# EAGLE board tlc5947-breakout (EAGLE 5.10)
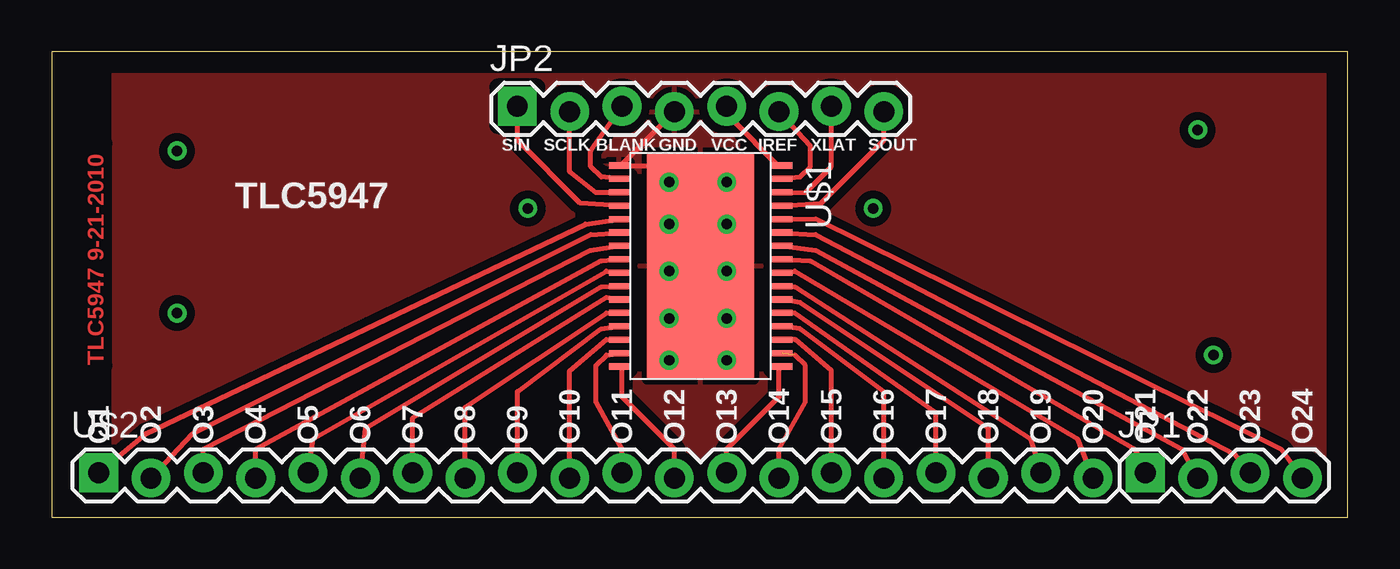
[diagram p0: board, top side]
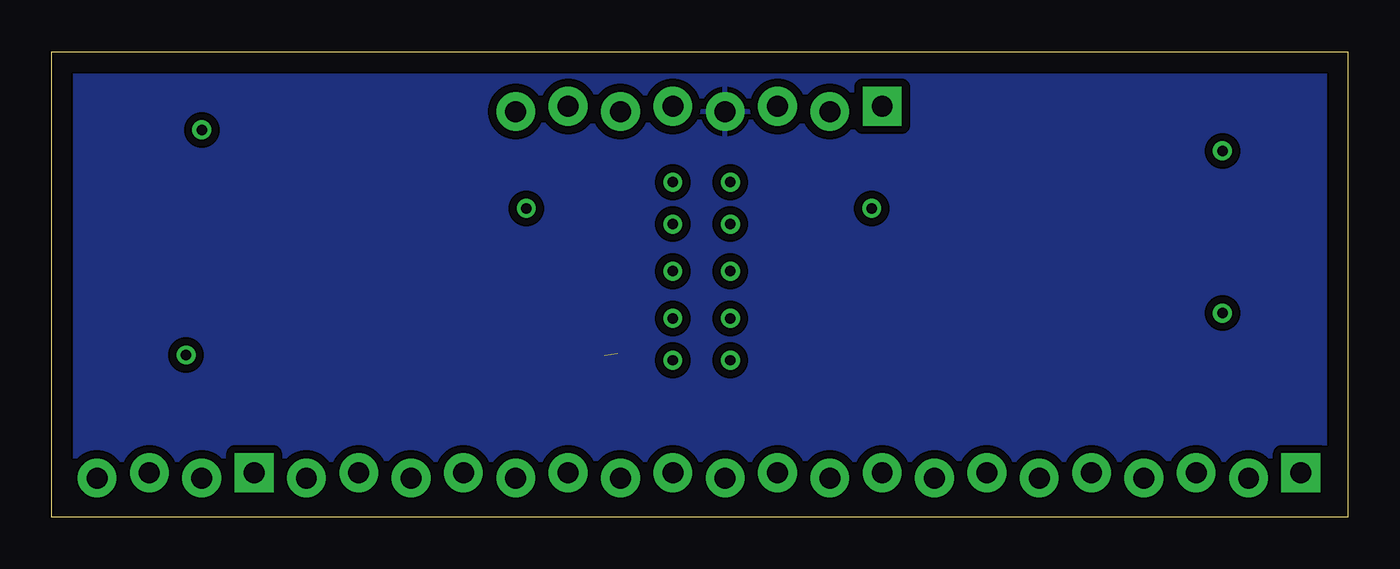
[diagram p1: board, bottom side, seen from below]

Size 62.92 x 22.6 mm. Coordinates in mm from the lower left corner, seen from the top.
Outline: 0,0 62.92,0 62.92,22.6 0,22.6 0,0
Copper layers (1*16): Top 0.035mm / dielectric 1.5mm / Bottom 0.035mm
Design rules "default": minimum track width 10mil, minimum drill 24mil, track to track 8mil, track to pad 8mil, pad to pad 8mil, via to via 8mil, smd to smd 8mil, copper to edge 40mil, drill to drill 8mil, minimum pad ring 10mil, minimum via ring 8mil, stop-mask expansion 4mil, vias tented up to drill 0mil, thermal gap 10mil

## Footprints (pad centres in the part's own frame; a part is rotated, then mirrored left to right if it is on the bottom)
1X04_LOCK = drill 1.016 pad 1.88 square: 1 0,0.127 | drill 1.016 pad 1.88 round: 2 2.54,-0.127; 3 5.08,0.127; 4 7.62,-0.127
1X08_LOCK = drill 1.016 pad 1.88 square: 1 0,0.127 | drill 1.016 pad 1.88 round: 2 2.54,-0.127; 3 5.08,0.127; 4 7.62,-0.127; 5 10.16,0.127; 6 12.7,-0.127; 7 15.24,0.127; 8 17.78,-0.127
HTSSOP32DAP = smd 0.3 x 1: 1 -4.875,-3.95; 2 -4.225,-3.95; 3 -3.575,-3.95; 4 -2.925,-3.95; 5 -2.275,-3.95; 6 -1.625,-3.95; 7 -0.975,-3.95; 8 -0.325,-3.95; 9 0.325,-3.95; 10 0.975,-3.95; 11 1.625,-3.95; 12 2.275,-3.95; 13 2.925,-3.95; 14 3.575,-3.95; 15 4.225,-3.95; 16 4.875,-3.95; 17 4.875,3.95; 18 4.225,3.95; 19 3.575,3.95; 20 2.925,3.95; 21 2.275,3.95; 22 1.625,3.95; 23 0.975,3.95; 24 0.325,3.95; 25 -0.325,3.95; 26 -0.975,3.95; 27 -1.625,3.95; 28 -2.275,3.95; 29 -2.925,3.95; 30 -3.575,3.95; 31 -4.225,3.95; 32 -4.875,3.95 | smd 11 x 5.2: EXP 0,0
1X20_LOCK = drill 1.016 pad 1.88 square: 1 0,0.127 | drill 1.016 pad 1.88 round: 2 2.54,-0.127; 3 5.08,0.127; 4 7.62,-0.127; 5 10.16,0.127; 6 12.7,-0.127; 7 15.24,0.127; 8 17.78,-0.127; 9 20.32,0.127; 10 22.86,-0.127; 11 25.4,0.127; 12 27.94,-0.127; 13 30.48,0.127; 14 33.02,-0.127; 15 35.56,0.127; 16 38.1,-0.127; 17 40.64,0.127; 18 43.18,-0.127; 19 45.72,0.127; 20 48.26,-0.127

## Placement (x,y rotation side)
JP1  [1X04_LOCK]  53.09,2.03 0 top
JP2  [1X08_LOCK]  22.61,19.81 0 top
U$1  TLC5947DAP  [HTSSOP32DAP]  31.5,12.19 270 top
U$2  M20LOCK  [1X20_LOCK]  2.29,2.03 0 top

## Library data of the parts
JP1 JP2 U$2 = SparkFun
U$1 = ideabot

## Nets
GND: JP2.4 U$1.1 U$1.EXP
N$1: U$1.16 U$2.12
N$2: U$1.15 U$2.11
N$3: U$1.14 U$2.10
N$4: U$1.13 U$2.9
N$5: U$1.12 U$2.8
N$6: U$1.11 U$2.7
N$7: U$1.10 U$2.6
N$8: U$1.9 U$2.5
N$9: U$1.8 U$2.4
N$10: U$1.7 U$2.3
N$11: U$1.6 U$2.2
N$12: U$1.5 U$2.1
N$13: U$1.17 U$2.13
N$14: U$1.18 U$2.14
N$15: U$1.19 U$2.15
N$16: U$1.20 U$2.16
N$17: U$1.21 U$2.17
N$18: U$1.22 U$2.18
N$19: U$1.23 U$2.19
N$20: U$1.24 U$2.20
N$21: JP1.1 U$1.25
N$22: JP1.2 U$1.26
N$23: JP1.3 U$1.27
N$24: JP1.4 U$1.28
N$25: JP2.8 U$1.29
N$26: JP2.7 U$1.30
N$27: JP2.6 U$1.31
N$29: JP2.1 U$1.4
N$31: JP2.3 U$1.2
N$32: JP2.2 U$1.3
S$2: JP2.5 U$1.32

## Tracks (layer width: path | path; a pad name or v marks a point on that pad's centre or on a via)
GND
  Top 0.254: JP2.4 27.61,17.07 U$1.1 29.16,17.07 29.21,17.02 29.21,14.48 U$1.EXP
  pour Top (isolate 0.406): 3.05,0.51 3.05,21.59 62.23,21.59 62.23,0.51
  pour Bottom (isolate 0.406): 62.23,0.51 0.76,0.51 0.76,21.84 62.23,21.84
N$1
  Top 0.254: U$2.12 30.23,3.3 27.69,5.84 27.69,7.18 U$1.16
N$2
  Top 0.254: U$2.11 27.69,3.3 26.42,5.59 26.42,7.37 26.92,7.87 U$1.15
N$3
  Top 0.254: U$2.10 25.15,7.11 26.92,8.64 U$1.14
N$4
  Top 0.254: U$2.9 22.61,6.1 26.67,9.14 U$1.13
N$5
  Top 0.254: U$2.8 20.07,5.33 26.92,9.91 U$1.12
N$6
  Top 0.254: U$2.7 17.53,4.83 26.92,10.67 U$1.11
N$7
  Top 0.254: U$2.6 15.24,4.32 26.67,11.18 U$1.10
N$8
  Top 0.254: U$2.5 12.7,3.81 26.92,11.94 U$1.9
N$9
  Top 0.254: U$2.4 9.91,3.3 26.67,12.45 U$1.8
N$10
  Top 0.254: U$2.3 7.37,3.3 26.16,12.95 U$1.7
N$11
  Top 0.254: U$2.2 6.86,4.06 26.16,13.72 U$1.6
N$12
  Top 0.254: U$2.1 4.57,4.06 25.91,14.22 U$1.5
N$13
  Top 0.254: U$2.13 32.77,3.3 35.31,5.84 35.31,7.18 U$1.17
N$14  (1 unrouted)
  Top 0.254: U$2.14 35.31,3.3 36.58,5.59 36.58,7.37 36.07,7.87
N$15
  Top 0.254: U$2.15 37.85,7.11 36.07,8.64 U$1.19
N$16
  Top 0.254: U$2.16 40.39,6.1 36.32,9.14 U$1.20
N$17
  Top 0.254: U$2.17 42.93,5.08 36.07,9.91 U$1.21
N$18
  Top 0.254: U$2.18 45.47,4.32 36.32,10.41 U$1.22
N$19
  Top 0.254: U$2.19 47.5,3.81 36.07,11.18 U$1.23
N$20
  Top 0.254: U$2.20 49.78,3.81 36.07,11.94 U$1.24
N$21
  Top 0.254: JP1.1 52.58,3.3 36.83,12.45 U$1.25
N$22
  Top 0.254: JP1.2 54.86,3.3 37.08,12.95 U$1.26
N$23
  Top 0.254: JP1.3 57.4,3.05 37.08,13.72 U$1.27
N$24
  Top 0.254: JP1.4 59.69,3.3 37.08,14.48 U$1.28
N$25
  Top 0.254: U$1.29 37.34,15.24 40.39,18.29 JP2.8
N$26
  Top 0.254: U$1.30 36.58,15.75 37.85,17.02 JP2.7
N$27
  Top 0.254: U$1.31 36.32,16.51 36.83,17.02 36.83,18.03 JP2.6
N$29
  Top 0.254: U$1.4 25.65,15.24 22.61,18.29 JP2.1
N$31
  Top 0.254: U$1.2 26.67,16.51 26.16,17.02 26.16,17.78 JP2.3
N$32
  Top 0.254: U$1.3 27.43,15.75 26.42,15.75 25.15,16.76 JP2.2
S$1  (via drill 0.51)
  other vias: 6.1,17.78
S$2
  Top 0.254: U$1.32 35.26,17.07 33.02,19.3 33.02,19.69 JP2.5
S$3  (via drill 0.51)
  other vias: 29.97,16.26
S$4  (via drill 0.51)
  other vias: 32.77,16.26
S$5  (via drill 0.51)
  other vias: 32.77,14.22
S$6  (via drill 0.51)
  other vias: 29.97,14.22
S$7  (via drill 0.51)
  other vias: 29.97,11.94
S$8  (via drill 0.51)
  other vias: 32.77,11.94
S$9  (via drill 0.51)
  other vias: 32.77,9.65
S$10  (via drill 0.51)
  other vias: 29.97,9.65
S$11  (via drill 0.51)
  other vias: 29.97,7.62
S$12  (via drill 0.51)
  other vias: 32.77,7.62
S$13  (via drill 0.51)
  other vias: 6.1,9.91
S$14  (via drill 0.51)
  other vias: 23.11,14.99
S$15  (via drill 0.51)
  other vias: 39.88,14.99
S$16  (via drill 0.51)
  other vias: 55.63,18.8
S$17  (via drill 0.51)
  other vias: 56.39,7.87
S$18
  pour Bottom: 12.95,12.95 12.95,10.16 6.86,12.95

## Text on the board
Top: TLC5947 9-21-2010
tPlace: SIN | SCLK | BLANK | GND | VCC | IREF | XLAT | SOUT | TLC5947 | O1 | O2 | O3 | O4 | O5 | O6 | O7 | O8 | O9 | O10 | O11 | O12 | O13 | O14 | O15 | O16 | O17 | O18 | O19 | O20 | O21 | O22 | O23 | O24